# Altium PCB old_Sampler_DIOT.PCBDOC (part 7 of 8)
Units mm, origin at the board's own origin, x right, y up, seen from the top; angles counter-clockwise.
Board outline 221.17 x 100 mm, 4 copper layers (Top, GP1(GND), L3, Bot), stack 1.648 mm thick; 664 components, 413 nets, 2128 pads, 926 vias.
Unrouted connection lines stored in the file: 1.
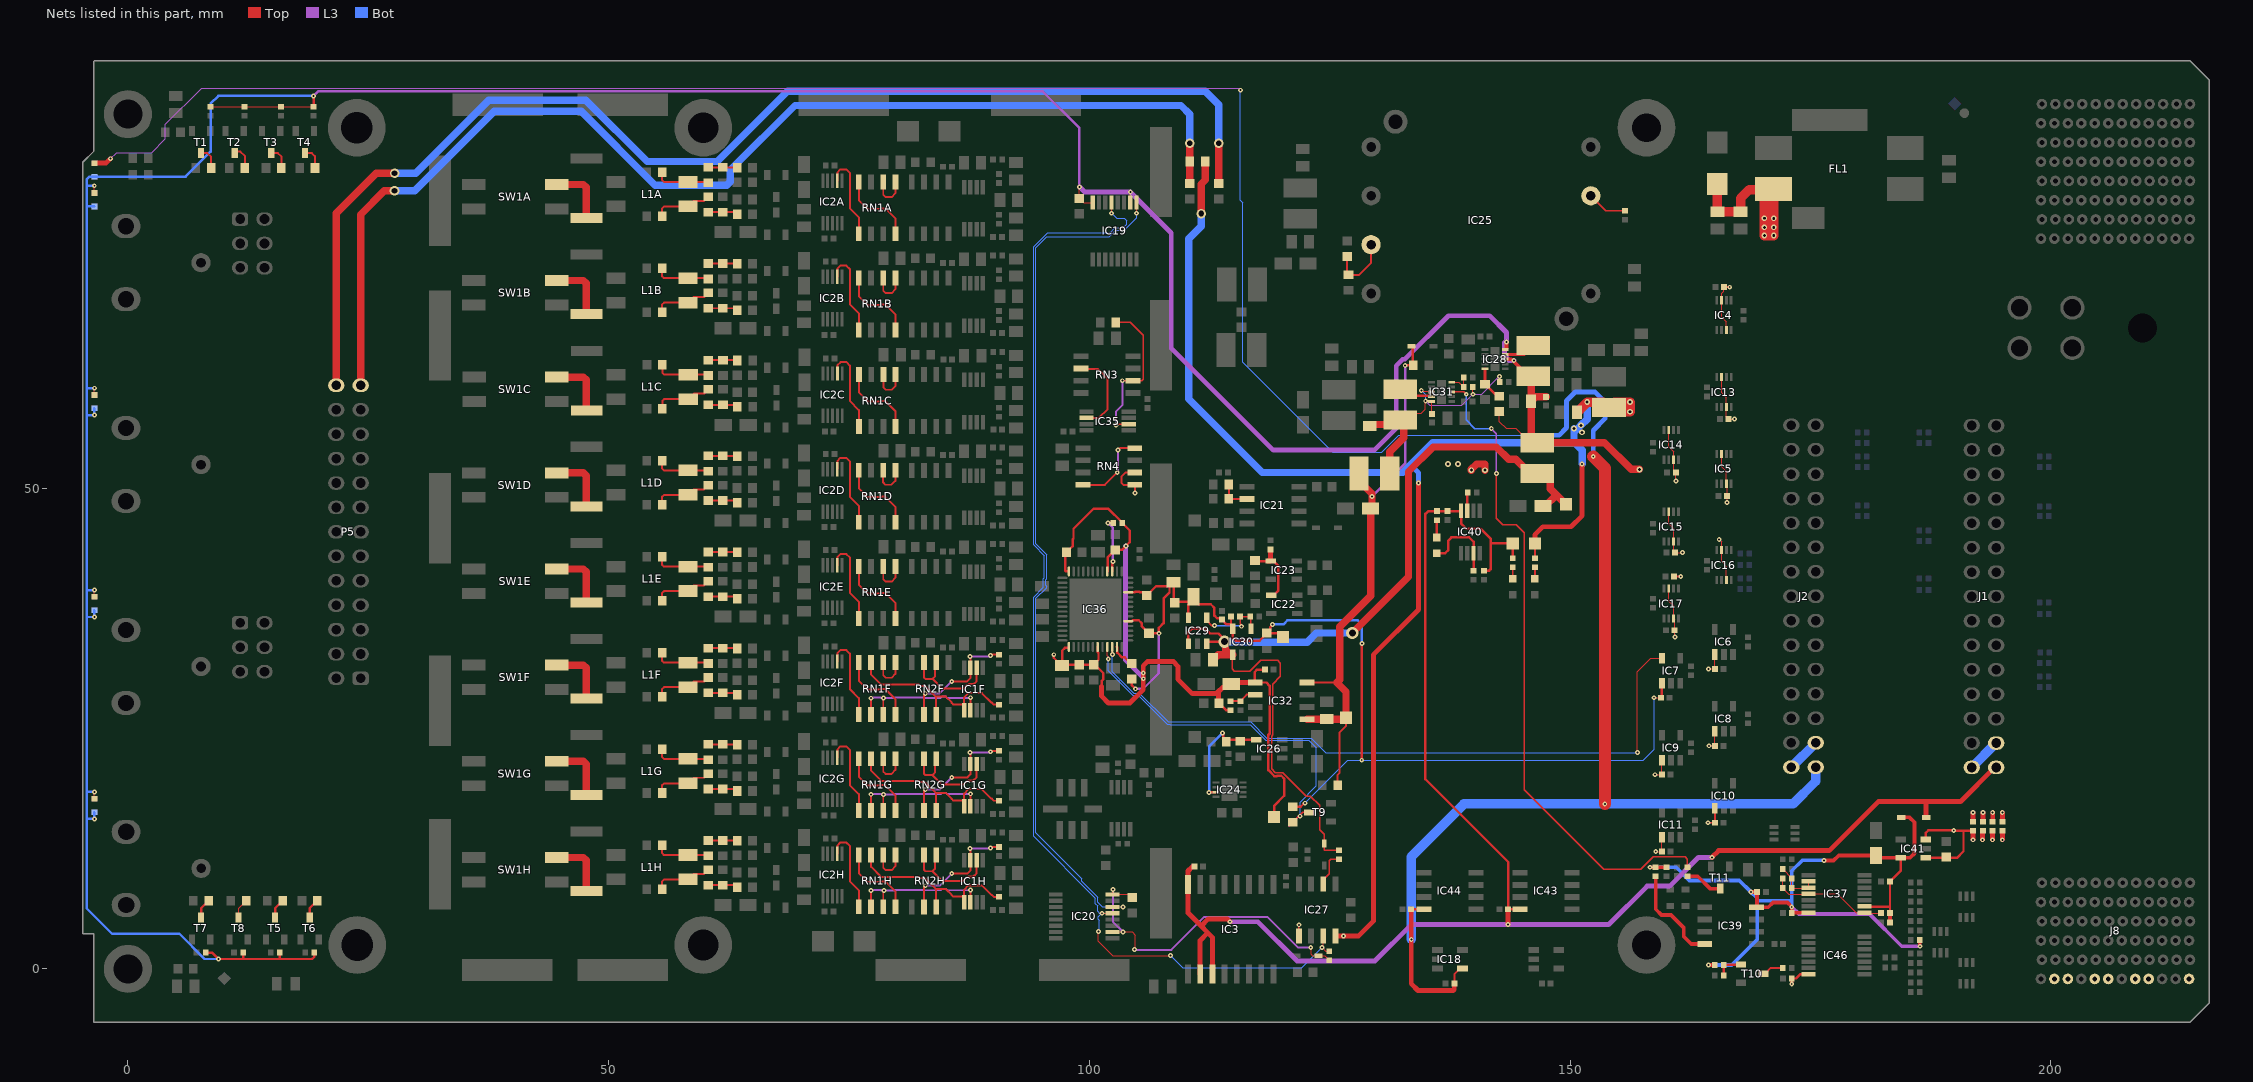
[diagram p8: the nets of this part, all layers, seen from the top]

## Via types
v1: diameter 0.5, hole 0.2, Top to Bot, tented both sides, 694 vias
v2: diameter 0.5, hole 0.2, Top to Bot, 186 vias
v3: diameter 0.6, hole 0.3, Top to Bot, tented both sides, 24 vias
v4: diameter 1, hole 0.6, Top to Bot, tented both sides, 12 vias
v5: diameter 0.6, hole 0.3, Top to Bot, 6 vias
v6: diameter 0.406, hole 0.203, Top to Bot, 2 vias
v7: diameter 1.27, hole 0.711, Top to Bot, 2 vias

## Nets (pads, with @x,y where several pads share a name; then routed paths per layer and width w, separated by ;. In a path a pad name is that pad's centre, name@x,y a point inside that pad or via, vN(x,y) a via of type N, cw(c..) or ccw(c..) an arc to the next point about the centre after c; other vN are vias at no path point) (continued)
NetIC1F_1: IC1F.1 R6F.1 RN1F.7 RN2F.7 | length 19.7
  Top w0.203: RN1F.7@77.288,31.857 77.288,30.611 78.344,29.555 82.277,29.555 82.407,29.425 82.91,29.425 84.064,28.27 ; RN2F.7@84.064,26.455 84.064,28.27 ; IC1F.1@86.969,26.909 IC1F.1@86.969,27.506 ; R6F.1@90.603,27.486 90.073,27.486 89.853,27.706 89.793,27.706 88.815,28.684 87.421,28.684 86.969,28.232 IC1F.1@86.969,27.506 ; 84.064,28.27 84.103,28.309 85.067,28.309 85.665,27.711 85.665,27.67 85.829,27.506 IC1F.1@86.969,27.506
NetIC1F_2: IC1F.2 RN1F.2 RN1F.3 | length 15
  Top w0.203: v1(77.269,28.155) 77.269,26.477 RN1F.2@77.288,26.457 ; RN1F.3@78.558,26.457 78.558,28.144 v1(78.594,28.18) ; IC1F.2@87.619,26.909 v1(87.619,28.205)
  L3 w0.203: v1(77.269,28.155) 77.319,28.205 78.292,28.205 78.346,28.151 ; v1@78.594,28.151 79.74,28.151 79.794,28.205 82.703,28.205 82.731,28.177 84.539,28.177 84.671,28.309 85.067,28.309 85.199,28.177 87.591,28.177 v1(87.619,28.205)
NetIC1F_6: IC1F.6 RN2F.2 RN2F.3 | length 11.1
  Top w0.203: RN2F.3@82.794,31.855 82.794,30.29 82.929,30.155 83.679,30.155 ; RN2F.2@84.064,31.855 83.929,31.72 83.929,30.405 83.679,30.155 ; IC1F.6@88.269,31.309 88.269,29.934 87.944,29.609 87.465,29.609 87.391,29.535 87.257,29.535 86.877,29.155 84.679,29.155 83.679,30.155
NetIC1F_7: IC1F.7 R12F.1 RN2F.6 | length 13
  Top w0.203: RN2F.6@82.794,26.455 82.794,28.52 v1(82.929,28.655) ; v1(85.679,29.905) 87.294,29.905 87.619,30.23 IC1F.7@87.619,31.309 87.619,32.48 v1(87.594,32.505) ; v1(89.719,32.58) 89.815,32.676 R12F.1@90.603,32.676
  L3 w0.203: v1(82.929,28.655) 84.429,28.655 v1(85.679,29.905) ; v1(87.594,32.505) 89.644,32.505 v1(89.719,32.58)
NetIC1G_1: IC1G.1 R6G.1 RN1G.7 RN2G.7 | length 19.7
  Top w0.203: RN1G.7@77.288,21.857 77.288,20.611 78.344,19.555 82.277,19.555 82.407,19.425 82.91,19.425 84.064,18.27 ; RN2G.7@84.064,16.455 84.064,18.27 ; IC1G.1@86.969,16.909 IC1G.1@86.969,17.506 ; R6G.1@90.603,17.486 90.073,17.486 89.853,17.706 89.793,17.706 88.815,18.684 87.421,18.684 86.969,18.232 IC1G.1@86.969,17.506 ; 84.064,18.27 84.103,18.309 85.067,18.309 85.665,17.711 85.665,17.67 85.829,17.506 IC1G.1@86.969,17.506
NetIC1G_2: IC1G.2 RN1G.2 RN1G.3 | length 15.3
  Top w0.203: v1(77.269,18.155) 77.298,18.126 77.298,17.207 77.269,17.178 77.269,16.477 RN1G.2@77.288,16.457 ; RN1G.3@78.558,16.457 78.558,18.116 v1(78.594,18.151) ; IC1G.2@87.619,16.909 v1(87.619,18.205)
  L3 w0.203: v1(77.269,18.155) 77.319,18.205 78.292,18.205 78.346,18.151 v1(78.594,18.151) 79.74,18.151 79.794,18.205 82.703,18.205 82.731,18.177 84.539,18.177 84.671,18.309 85.067,18.309 85.199,18.177 87.591,18.177 v1(87.619,18.205)
NetIC1G_6: IC1G.6 RN2G.2 RN2G.3 | length 11.1
  Top w0.203: RN2G.3@82.794,21.855 82.794,20.29 82.929,20.155 83.679,20.155 ; RN2G.2@84.064,21.855 83.929,21.72 83.929,20.405 83.679,20.155 ; IC1G.6@88.269,21.309 88.269,19.934 87.944,19.609 87.465,19.609 87.391,19.535 87.257,19.535 86.877,19.155 84.679,19.155 83.679,20.155
NetIC1G_7: IC1G.7 R12G.1 RN2G.6 | length 13
  Top w0.203: RN2G.6@82.794,16.455 82.794,18.52 v1(82.929,18.655) ; v1(85.679,19.905) 87.294,19.905 87.619,20.23 87.619,22.48 v1(87.594,22.505) ; v1(89.719,22.58) 89.815,22.676 R12G.1@90.603,22.676
  L3 w0.203: v1(82.929,18.655) 84.429,18.655 v1(85.679,19.905) ; v1(87.594,22.505) 89.644,22.505 v1(89.719,22.58)
NetIC1H_1: IC1H.1 R6H.1 RN1H.7 RN2H.7 | length 19.7
  Top w0.203: RN1H.7@77.288,11.857 77.288,10.611 78.344,9.555 82.277,9.555 82.407,9.425 82.91,9.425 84.064,8.27 ; RN2H.7@84.064,6.455 84.064,8.27 ; IC1H.1@86.969,6.909 IC1H.1@86.969,7.506 ; R6H.1@90.603,7.486 90.073,7.486 89.853,7.706 89.793,7.706 88.815,8.684 87.421,8.684 86.969,8.232 IC1H.1@86.969,7.506 ; 84.064,8.27 84.103,8.309 85.067,8.309 85.665,7.711 85.665,7.67 85.829,7.506 IC1H.1@86.969,7.506
NetIC1H_2: IC1H.2 RN1H.2 RN1H.3 | length 15.3
  Top w0.203: v1(77.269,8.155) 77.269,6.477 RN1H.2@77.288,6.457 ; RN1H.3@78.558,6.457 78.558,8.091 v1(78.619,8.151) ; IC1H.2@87.619,6.909 v1(87.619,8.205)
  L3 w0.203: v1(77.269,8.155) 77.319,8.205 78.292,8.205 78.346,8.151 v1(78.619,8.151) 79.74,8.151 79.794,8.205 82.703,8.205 82.731,8.177 84.539,8.177 84.671,8.309 85.067,8.309 85.199,8.177 87.591,8.177 v1(87.619,8.205)
NetIC1H_6: IC1H.6 RN2H.2 RN2H.3 | length 11.1
  Top w0.203: RN2H.3@82.794,11.855 82.794,10.29 82.929,10.155 83.679,10.155 ; RN2H.2@84.064,11.855 83.929,11.72 83.929,10.405 83.679,10.155 ; IC1H.6@88.269,11.309 88.269,9.934 87.944,9.609 87.465,9.609 87.391,9.535 87.257,9.535 86.877,9.155 84.679,9.155 83.679,10.155
NetIC1H_7: IC1H.7 R12H.1 RN2H.6 | length 13
  Top w0.203: RN2H.6@82.794,6.455 82.794,8.52 v1(82.929,8.655) ; v1(85.679,9.905) 87.294,9.905 87.619,10.23 87.619,12.48 v1(87.594,12.505) ; v1(89.719,12.58) 89.815,12.676 R12H.1@90.603,12.676
  L3 w0.203: v1(82.929,8.655) 84.429,8.655 v1(85.679,9.905) ; v1(87.594,12.505) 89.644,12.505 v1(89.719,12.58)
NetIC2A_7: IC2A.7 RN1A.1 | length 9.2
  Top w0.203: IC2A.7@73.775,81.967 73.775,82.815 74.105,83.145 74.723,83.145 75.075,82.793 75.075,79.11 76.018,78.167 RN1A.1@76.018,76.457
NetIC2B_7: IC2B.7 RN1B.1 | length 9.2
  Top w0.203: IC2B.7@73.775,71.967 73.775,72.815 74.105,73.145 74.723,73.145 75.075,72.793 75.075,69.11 76.018,68.167 RN1B.1@76.018,66.457
NetIC2C_7: IC2C.7 RN1C.1 | length 9.2
  Top w0.203: IC2C.7@73.788,61.923 73.788,62.771 74.118,63.101 74.736,63.101 75.088,62.749 75.088,59.066 76.031,58.123 RN1C.1@76.031,56.413
NetIC2D_7: IC2D.7 RN1D.1 | length 9.2
  Top w0.203: IC2D.7@73.775,51.967 73.775,52.815 74.105,53.145 74.723,53.145 75.075,52.793 75.075,49.11 76.018,48.167 RN1D.1@76.018,46.457
NetIC2E_7: IC2E.7 RN1E.1 | length 9.2
  Top w0.203: IC2E.7@73.775,41.967 73.775,42.815 74.105,43.145 74.723,43.145 75.075,42.793 75.075,39.11 76.018,38.167 RN1E.1@76.018,36.457
NetIC2F_7: IC2F.7 RN1F.1 | length 9.2
  Top w0.203: IC2F.7@73.775,31.967 73.775,32.815 74.105,33.145 74.723,33.145 75.075,32.793 75.075,29.11 76.018,28.167 RN1F.1@76.018,26.457
NetIC2G_7: IC2G.7 RN1G.1 | length 9.2
  Top w0.203: IC2G.7@73.775,21.967 73.775,22.815 74.105,23.145 74.723,23.145 75.075,22.793 75.075,19.11 76.018,18.167 RN1G.1@76.018,16.457
NetIC2H_7: IC2H.7 RN1H.1 | length 9.2
  Top w0.203: IC2H.7@73.775,11.967 73.775,12.815 74.105,13.145 74.723,13.145 75.075,12.793 75.075,9.11 76.018,8.167 RN1H.1@76.018,6.457
NetIC7_5: IC7.5 IC36.24 | length 72.2
  Top w0.127: IC36.24@102.364,33.49 102.364,32.717 v1(102.399,32.682) ; v2(157,22.5) 157,30.9 158.4,32.3 IC7.5@159.55,32.3
  Bot w0.127: v1(102.399,32.682) 102.399,30.902 104.612,28.69 105.203,28.69 108.203,25.69 116.774,25.69 118.455,24.008 123.066,24.008 124.574,22.5 v2(157,22.5)
NetIC19_9: IC19.9 IC20.14 | length 89.1
  Top w0.127: IC20.14@102.399,6.437 v1(103.501,6.437) ; v1(104.904,78.595) IC19.9@104.904,79.697
  Bot w0.127: v1(103.501,6.437) 101.324,6.437 100.856,6.904 100.856,7.468 99.194,9.13 99.194,9.38 94.44,14.134 94.44,38.53 95.575,39.665 95.575,39.801 95.477,39.9 95.477,40.492 95.575,40.591 95.575,43.079 94.44,44.214 94.44,56.774 94.443,56.777 94.443,57.583 94.44,57.586 94.44,74.991 95.583,76.134 102.075,76.134 102.761,76.82 103.617,76.82 104.904,78.107 v1(104.904,78.595)
NetIC21_2: IC21.2 R51.1 R52.2 | length 3.4
  Top w0.203: R52.2@114.494,50.38 R51.1@114.494,48.88 116.378,48.88 IC21.2@116.393,48.864
NetIC22_4: IC22.4 IC23.4 R54.1 R55.2 | length 7.4
  Top w0.254: R54.1@117.217,42.48 117.289,42.408 IC23.4@118.569,42.408 ; IC23.4@118.832,42.408 119.13,42.408 119.648,41.89 119.648,39.344 119.169,38.865 IC22.4@118.894,38.865
  Top w0.508: IC23.4@118.558,42.408 118.569,42.419 IC23.4@118.844,42.419 118.832,42.431 118.832,43.609 R55.2@118.819,43.621
NetIC24_3: IC24.3 IC26.4 R61.1 R63.2 | length 11.7
  Top w0.254: v1(112.438,18.355) 112.465,18.382 113.167,18.382 IC24.3@113.169,18.384 ; v1(113.837,24.53) 113.921,24.446 113.921,23.953 R63.2@114.244,23.63 114.444,23.83 IC26.4@117.344,23.83
  Bot w0.254: v1(112.438,18.355) 112.47,18.387 112.47,23.163 v1(113.837,24.53)
NetIC25_2: IC25.2 R57.2 | length 4.2
  Top w0.203: IC25.2@152.154,80.405 153.709,78.85 R57.2@155.694,78.85
NetIC25_6: IC25.6 R56.1 R58.2 | length 6.7
  Top w0.203: R58.2@126.813,74.099 126.813,72.311 R56.1@126.944,72.18 128.055,72.18 129.294,73.419 IC25.6@129.294,75.325
NetIC27_2: IC27.2 R60.1 | length 3.7
  Top w0.152: IC27.2@124.329,8.83 124.329,9.265 124.944,9.88 124.944,11.23 125.124,11.41 R60.1@125.944,11.41
NetIC28_5: IC28.5 R66.1 R68.2 | length 3.4
  Top w0.305: R68.2@141.141,60.82 142.391,59.57 R66.1@142.641,59.57 ; R68.2@141.142,61.069 IC28.5@141.142,62.415
NetIC28_9: IC28.9 L7.1 | length 3.3
  Top w0.33: IC28.9@143.242,63.915 145.245,63.915 L7.1@146.165,64.835
NetIC29_4: IC29.4 IC30.4 R70.1 R71.2 | length 7.6
  Top w0.152: IC29.4@112.194,36.532 112.194,36.257 112.742,35.709 v1(113.021,35.709) ; v1(115.821,35.632) 115.821,35.726 115.664,35.883 R70.1@115.664,36.63 R71.2@116.724,36.63 116.795,36.559 IC30.4@116.795,35.379
  Bot w0.152: v1(113.021,35.709) 113.06,35.671 115.782,35.671 v1(115.821,35.632)
NetIC31_3: IC31.3 R111.2 | length 68.9
  Top w0.152: IC31.3@137.691,60.02 138.533,60.02 138.547,60.007 138.955,60.007 v2(139.192,59.77) ; v2(142.33,51.529) 142.33,46.87 143,46.2 144.4,46.2 145.245,45.355 145.245,18.606 153.506,10.346 154.761,10.346 157.346,10.346 158.653,11.653 160.912,11.653 161.288,11.653 161.947,11.653 162.2,11.4 R111.2@162.2,10.57
  L3 w0.152: v2(141.8,56.2) 142.33,55.67 v2(142.33,51.529)
  Bot w0.152: v2(139.192,59.77) 139.192,57.109 140.1,56.2 v2(141.8,56.2)
NetIC31_5: IC31.5 R72.1 R74.2 | length 2.4
  Top w0.127: IC31.5@137.691,61.02 138.421,61.02 R72.1@138.921,60.52 R74.2@138.921,61.52
NetIC31_9: IC31.9 L9.1 | length 3.6
  Top w0.127: L9.1@132.313,60.295 L9.1@133.002,59.606 ; IC31.9@135.504,59.606 IC31.9@135.591,59.52
  Top w0.254: L9.1@133.002,59.606 IC31.9@135.504,59.606
NetIC32_2: IC32.2 R73.1 R75.2 | length 2.8
  Top w0.203: R73.1@114.694,27.85 R75.2@115.694,27.85 116.359,28.515 IC32.2@117.244,28.515
NetIC35_2: IC35.2 RN3.6 | length 8.9
  Top w0.203: RN3.6@99.144,62.44 99.183,62.401 100.873,62.401 101.894,61.38 101.894,58.228 100.971,57.305 IC35.2@99.694,57.305
NetIC35_6: IC35.6 R83.1 RN3.2 | length 16.5
  Top w0.152: R83.1@102.744,67.23 104.269,67.23 105.594,65.905 105.594,61.305 105.459,61.17 RN3.2@104.544,61.17 ; v1(102.769,56.555) 102.869,56.655 IC35.6@104.094,56.655
  Top w0.203: v1(103.419,61.18) 103.429,61.17 RN3.2@104.544,61.17
  L3 w0.203: v1(102.769,56.555) 102.769,57.98 103.419,58.63 v1(103.419,61.18)
NetIC36_23: IC36.23 R76.2 T9.3 | length 38
  Top w0.127: IC36.23@101.864,33.49 101.864,32.545 101.958,32.451 v1(101.958,32.229)
  Top w0.152: R76.2@120.756,14.86 R76.2@121.159,15.264 122.163,16.267 T9.3@122.829,16.267
  Bot w0.127: v1(101.958,32.229) 101.958,30.984 104.506,28.436 105.098,28.436 108.098,25.436 108.348,25.436 108.386,25.397 116.706,25.397 118.35,23.754 122.82,23.754 123.594,22.98 123.594,19.041 121.909,17.356 v1(121.909,15.88)
NetIC36_25: IC36.25 R77.2 | length 2.4
  Top w0.254: IC36.25@102.864,33.49 102.903,33.451 102.903,32.884 103.382,32.405 103.669,32.405 R77.2@104.269,31.805
NetIC36_43: IC36.43 R78.1 | length 5.8
  Top w0.254: v1(101.944,46.38) R78.1@102.474,46.38 ; IC36.43@102.364,41.34 102.364,42.285 v1(102.444,42.365)
  L3 w0.254: v1(101.944,46.38) 102.444,45.88 v1(102.444,42.365)
NetIC37_1: IC37.1 IC37.11 R103.1 R105.1 R106.1 | length 12.5
  Top w0.127: R106.1@172.13,9.55 R105.1@172.13,8.4 172.755,7.775 174.8,7.775 IC37.11@175.001,7.775 ; IC37.11@174.8,7.8 175.001,7.8 177.796,7.8 179.771,5.825 IC37.1@180.6,5.825 ; IC37.1@180.6,5.85 180.675,5.775 R103.1@182.131,5.775
NetIC37_9: IC37.9 IC37.10 R105.2 R106.2 R108.2 | length 4.9
  Top w0.127: R108.2@172.13,10.39 173.07,9.45 R106.2@173.07,9.4 ; R106.2@173.07,9.55 R105.2@173.07,8.4 IC37.10@174.8,8.4 ; IC37.10@174.8,8.45 IC37.9@174.8,9.1
NetIC39_4: IC39.4 R110.2 | length 10.6
  Top w0.381: R110.2@158.9,9.63 158.9,6.2 159.5,5.6 160.5,5.6 161.8,4.3 161.8,3.4 162.605,2.595 IC39.4@164,2.595
NetIC40_3: IC40.3 LD6.1 R116.1 | length 8.1
  Top w0.254: LD6.1@136.13,43.225 136.989,43.225 137.33,43.566 137.33,44.55 137.655,44.875 139.505,44.875 139.961,44.419 139.961,43.2 R116.1@139.961,41.62 ; R116.1@139.93,41.37 R116.1@139.93,41.42
NetIC40_7: IC40.7 R117.2 | length 1.9
  Top w0.254: IC40.7@139.311,47.65 R117.2@139.311,49.55
NetL1A_3: L1A.3 R8A.2 R9A.1 | length 6.1
  Top w0.203: R8A.2@55.564,78.288 55.564,79.113 55.755,79.304 L1A.3@58.26,79.304 58.836,79.88 59.92,79.88 R9A.1@60.352,80.312
NetL1A_4: L1A.4 R1A.2 R2A.1 | length 5.7
  Top w0.203: R1A.2@55.564,82.86 55.564,82.029 55.749,81.844 L1A.4@58.26,81.844 60.268,81.844 R2A.1@60.352,81.76
NetL1B_3: L1B.3 R8B.2 R9B.1 | length 6.1
  Top w0.203: R8B.2@55.564,68.288 55.564,69.113 55.755,69.304 L1B.3@58.26,69.304 58.836,69.88 59.92,69.88 R9B.1@60.352,70.312
NetL1B_4: L1B.4 R1B.2 R2B.1 | length 5.7
  Top w0.203: R1B.2@55.564,72.86 55.564,72.029 55.749,71.844 L1B.4@58.26,71.844 60.268,71.844 R2B.1@60.352,71.76
NetL1C_3: L1C.3 R8C.2 R9C.1 | length 6.1
  Top w0.203: R8C.2@55.577,58.244 55.577,59.069 55.767,59.26 L1C.3@58.273,59.26 58.849,59.836 59.933,59.836 R9C.1@60.365,60.268
NetL1C_4: L1C.4 R1C.2 R2C.1 | length 5.7
  Top w0.203: R1C.2@55.577,62.816 55.577,61.985 55.762,61.8 L1C.4@58.273,61.8 60.281,61.8 R2C.1@60.365,61.716
NetL1D_3: L1D.3 R8D.2 R9D.1 | length 6.1
  Top w0.203: R8D.2@55.564,48.288 55.564,49.113 55.755,49.304 L1D.3@58.26,49.304 58.836,49.88 59.92,49.88 R9D.1@60.352,50.312
NetL1D_4: L1D.4 R1D.2 R2D.1 | length 5.7
  Top w0.203: R1D.2@55.564,52.86 55.564,52.029 55.749,51.844 L1D.4@58.26,51.844 60.268,51.844 R2D.1@60.352,51.76
NetL1E_3: L1E.3 R8E.2 R9E.1 | length 6.1
  Top w0.203: R8E.2@55.564,38.288 55.564,39.113 55.755,39.304 L1E.3@58.26,39.304 58.836,39.88 59.92,39.88 R9E.1@60.352,40.312
NetL1E_4: L1E.4 R1E.2 R2E.1 | length 5.7
  Top w0.203: R1E.2@55.564,42.86 55.564,42.029 55.749,41.844 L1E.4@58.26,41.844 60.268,41.844 R2E.1@60.352,41.76
NetL1F_3: L1F.3 R8F.2 R9F.1 | length 6.1
  Top w0.203: R8F.2@55.564,28.288 55.564,29.113 55.755,29.304 L1F.3@58.26,29.304 58.836,29.88 59.92,29.88 R9F.1@60.352,30.312
NetL1F_4: L1F.4 R1F.2 R2F.1 | length 5.7
  Top w0.203: R1F.2@55.564,32.86 55.564,32.029 55.749,31.844 L1F.4@58.26,31.844 60.268,31.844 R2F.1@60.352,31.76
NetL1G_3: L1G.3 R8G.2 R9G.1 | length 6.1
  Top w0.203: R8G.2@55.564,18.288 55.564,19.113 55.755,19.304 L1G.3@58.26,19.304 58.836,19.88 59.92,19.88 R9G.1@60.352,20.312
NetL1G_4: L1G.4 R1G.2 R2G.1 | length 5.7
  Top w0.203: R1G.2@55.564,22.86 55.564,22.029 55.749,21.844 L1G.4@58.26,21.844 60.268,21.844 R2G.1@60.352,21.76
NetL1H_3: L1H.3 R8H.2 R9H.1 | length 6.1
  Top w0.203: R8H.2@55.564,8.288 55.564,9.113 55.755,9.304 L1H.3@58.26,9.304 58.836,9.88 59.92,9.88 R9H.1@60.352,10.312
NetL1H_4: L1H.4 R1H.2 R2H.1 | length 5.7
  Top w0.203: R1H.2@55.564,12.86 55.564,12.029 55.749,11.844 L1H.4@58.26,11.844 60.268,11.844 R2H.1@60.352,11.76
NetLD6_2: LD6.2 R114.1 | length 1.8
  Top w0.254: LD6.2@136.13,44.875 R114.1@136.13,46.68
NetLD7_2: LD7.2 R119.1 | length 1.3
  Top w0.203: LD7.2@144.03,40.475 R119.1@144.03,41.78
NetLD8_2: LD8.2 R118.1 | length 1.2
  Top w0.203: LD8.2@146.33,40.575 R118.1@146.33,41.78
NetP5_25: P5.25 R41.1 R86.1 | length 123.4
  Top w0.762: P5.25@24.2,60.69 24.2,78.462 26.663,80.925 v4(27.725,80.925) ; R41.1@110.444,81.68 v4(110.444,85.88)
  Bot w0.762: v4(27.725,80.925) 29.818,80.925 38.082,89.189 47.135,89.189 54.819,81.505 62.269,81.505 62.649,81.885 62.649,83.085 69.369,89.805 109.519,89.805 110.444,88.88 v4(110.444,85.88)
NetP5_26: P5.26 R42.1 | length 129
  Top w0.762: P5.26@21.66,60.69 21.66,78.585 25.825,82.75 v4(27.73,82.75) ; R42.1@113.444,81.68 v4(113.444,85.88)
  Bot w0.762: v4(27.73,82.75) 29.93,82.75 37.53,90.35 47.63,90.35 54.008,83.972 61.297,83.972 68.598,91.273 112.051,91.273 113.444,89.88 v4(113.444,85.88)
NetR2A_2: R2A.2 R3A.1 R4A.2 | length 3
  Top w0.203: R2A.2@60.352,83.36 R4A.2@61.876,83.36 63.324,83.36 R3A.1@63.362,83.322
NetR2B_2: R2B.2 R3B.1 R4B.2 | length 3
  Top w0.203: R2B.2@60.352,73.36 63.324,73.36 R3B.1@63.362,73.322
NetR2C_2: R2C.2 R3C.1 R4C.2 | length 3
  Top w0.203: R2C.2@60.365,63.316 63.337,63.316 R3C.1@63.375,63.278
NetR2D_2: R2D.2 R3D.1 R4D.2 | length 3
  Top w0.203: R2D.2@60.352,53.36 R4D.2@61.876,53.36 63.324,53.36 R3D.1@63.362,53.322
NetR2E_2: R2E.2 R3E.1 R4E.2 | length 3
  Top w0.203: R2E.2@60.352,43.36 63.324,43.36 R3E.1@63.362,43.322
NetR2F_2: R2F.2 R3F.1 R4F.2 | length 3
  Top w0.203: R2F.2@60.352,33.36 R4F.2@61.876,33.36 63.324,33.36 R3F.1@63.362,33.322
NetR2G_2: R2G.2 R3G.1 R4G.2 | length 3
  Top w0.203: R2G.2@60.352,23.36 63.324,23.36 R3G.1@63.362,23.322
NetR2H_2: R2H.2 R3H.1 R4H.2 | length 3
  Top w0.203: R2H.2@60.352,13.36 R4H.2@61.876,13.36 63.324,13.36 R3H.1@63.362,13.322
NetR5A_1: R5A.1 SW1A.4 | length 6.4
  Top w0.203: R5A.1@47.652,78.147 R5A.1@47.694,78.105
  Top w0.762: SW1A.4@44.586,81.59 47.367,81.59 47.652,81.305 R5A.1@47.652,78.147
NetR5B_1: R5B.1 SW1B.4 | length 6.4
  Top w0.203: R5B.1@47.652,68.147 R5B.1@47.694,68.105
  Top w0.762: SW1B.4@44.586,71.59 47.367,71.59 47.652,71.305 R5B.1@47.652,68.147
NetR5C_1: R5C.1 SW1C.4 | length 6.4
  Top w0.203: R5C.1@47.665,58.103 R5C.1@47.707,58.061
  Top w0.762: SW1C.4@44.599,61.546 47.38,61.546 47.665,61.261 R5C.1@47.665,58.103
NetR5D_1: R5D.1 SW1D.4 | length 6.4
  Top w0.203: R5D.1@47.652,48.147 R5D.1@47.694,48.105
  Top w0.762: SW1D.4@44.586,51.59 47.367,51.59 47.652,51.305 R5D.1@47.652,48.147
NetR5E_1: R5E.1 SW1E.4 | length 6.4
  Top w0.203: R5E.1@47.652,38.147 R5E.1@47.694,38.105
  Top w0.762: SW1E.4@44.586,41.59 47.367,41.59 47.652,41.305 R5E.1@47.652,38.147
NetR5F_1: R5F.1 SW1F.4 | length 6.4
  Top w0.203: R5F.1@47.652,28.147 R5F.1@47.694,28.105
  Top w0.762: SW1F.4@44.586,31.59 47.367,31.59 47.652,31.305 R5F.1@47.652,28.147
NetR5G_1: R5G.1 SW1G.4 | length 6.4
  Top w0.203: R5G.1@47.652,18.147 R5G.1@47.694,18.105
  Top w0.762: SW1G.4@44.586,21.59 47.367,21.59 47.652,21.305 R5G.1@47.652,18.147
NetR5H_1: R5H.1 SW1H.4 | length 6.4
  Top w0.203: R5H.1@47.652,8.147 R5H.1@47.694,8.105
  Top w0.762: SW1H.4@44.586,11.59 47.367,11.59 47.652,11.305 R5H.1@47.652,8.147
NetR9A_2: R9A.2 R10A.1 R11A.2 | length 3.1
  Top w0.203: R9A.2@60.352,78.712 R11A.2@61.876,78.712 63.146,78.712 R10A.1@63.362,78.496
NetR9B_2: R9B.2 R10B.1 R11B.2 | length 3.1
  Top w0.203: R9B.2@60.352,68.712 63.146,68.712 R10B.1@63.362,68.496
NetR9C_2: R9C.2 R10C.1 R11C.2 | length 3.1
  Top w0.203: R9C.2@60.365,58.668 63.159,58.668 R10C.1@63.375,58.452
NetR9D_2: R9D.2 R10D.1 R11D.2 | length 3.1
  Top w0.203: R9D.2@60.352,48.712 63.146,48.712 R10D.1@63.362,48.496
NetR9E_2: R9E.2 R10E.1 R11E.2 | length 3.1
  Top w0.203: R9E.2@60.352,38.712 63.146,38.712 R10E.1@63.362,38.496
NetR9F_2: R9F.2 R10F.1 R11F.2 | length 3.1
  Top w0.203: R9F.2@60.352,28.712 R11F.2@61.876,28.712 63.146,28.712 R10F.1@63.362,28.496
NetR9G_2: R9G.2 R10G.1 R11G.2 | length 3.1
  Top w0.203: R9G.2@60.352,18.712 63.146,18.712 R10G.1@63.362,18.496
NetR9H_2: R9H.2 R10H.1 R11H.2 | length 3.1
  Top w0.203: R9H.2@60.352,8.712 R11H.2@61.876,8.712 63.146,8.712 R10H.1@63.362,8.496
NetR26_2: R26.2 T1.3 | length 2.4
  Top w0.203: T1.3@7.6,84.85 8.25,84.85 8.65,84.45 R26.2@8.65,83.3
NetR28_2: R28.2 T2.3 | length 2.4
  Top w0.203: T2.3@11.194,85 11.7,85 12.15,84.55 R28.2@12.15,83.3
NetR30_2: R30.2 T3.3 | length 2.4
  Top w0.203: T3.3@14.9,84.85 15.6,84.85 15.95,84.5 R30.2@15.95,83.3
NetR32_2: R32.2 T4.3 | length 2.4
  Top w0.203: T4.3@18.4,84.85 19.13,84.85 19.45,84.53 R32.2@19.45,83.3
NetR34_2: R34.2 T5.3 | length 2.1
  Top w0.254: T5.3@15.3,5.35 15.3,6.3 R34.2@16.1,7.1
NetR37_2: R37.2 T6.3 | length 2.1
  Top w0.254: T6.3@18.9,5.35 18.9,6.3 R37.2@19.7,7.1
NetR40_2: R40.2 T7.3 | length 2.1
  Top w0.254: T7.3@7.6,5.35 7.6,6.3 R40.2@8.4,7.1
NetR44_2: R44.2 T8.3 | length 2.1
  Top w0.127: T8.3@11.5,5.35 11.5,6.3 R44.2@12.3,7.1
NetR101_1: R101.1 T10.3 | length 2.4
  Top w0.203: T10.3@170.08,-0.5 170.28,-0.5 170.88,0.1 R101.1@172.13,0.1 R101.1@172.25,0.1
NetR102_1: R102.1 R157.2 T10.1 | length 2.9
  Top w0.254: R157.2@165.97,-0.7 R102.1@165.97,0.4 165.97,0.42 166,0.45 T10.1@167.78,0.45
NetR111_1: R111.1 T11.3 | length 3.9
  Top w0.381: R111.1@162.2,9.63 163.27,9.63 164.55,8.35 T11.3@165.6,8.35
NetRN1A_4: RN1A.4 RN1A.8 | length 8.1
  Top w0.203: RN1A.8@76.024,81.76 76.024,79.965 76.929,79.06 78.297,79.06 78.346,79.109 78.742,79.109 79.834,78.017 RN1A.4@79.834,76.36
NetRN1A_5: RN1A.5 RN1A.6 | length 4
  Top w0.203: RN1A.6@78.558,81.857 78.558,80.516 78.794,80.28 79.419,80.28 79.828,80.689 RN1A.5@79.828,81.857
NetRN1B_4: RN1B.4 RN1B.8 | length 8.1
  Top w0.203: RN1B.8@76.024,71.76 76.024,69.965 76.929,69.06 78.297,69.06 78.346,69.109 78.742,69.109 79.834,68.017 RN1B.4@79.834,66.36
NetRN1B_5: RN1B.5 RN1B.6 | length 4
  Top w0.203: RN1B.6@78.558,71.857 78.558,70.516 78.794,70.28 79.419,70.28 79.828,70.689 RN1B.5@79.828,71.857
NetRN1C_4: RN1C.4 RN1C.8 | length 8.1
  Top w0.203: RN1C.8@76.037,61.716 76.037,59.921 76.942,59.016 78.31,59.016 78.358,59.065 78.755,59.065 79.847,57.973 RN1C.4@79.847,56.316
NetRN1C_5: RN1C.5 RN1C.6 | length 4
  Top w0.203: RN1C.6@78.571,61.813 78.571,60.472 78.807,60.236 79.432,60.236 79.841,60.646 RN1C.5@79.841,61.813
NetRN1D_4: RN1D.4 RN1D.8 | length 8.1
  Top w0.203: RN1D.8@76.024,51.76 76.024,49.965 76.929,49.06 78.297,49.06 78.346,49.109 78.742,49.109 79.834,48.017 RN1D.4@79.834,46.36
NetRN1D_5: RN1D.5 RN1D.6 | length 4
  Top w0.203: RN1D.6@78.544,51.93 78.544,50.588 78.78,50.353 79.405,50.353 79.814,50.762 RN1D.5@79.814,51.93
NetRN1E_4: RN1E.4 RN1E.8 | length 8.1
  Top w0.203: RN1E.8@76.024,41.76 76.024,39.965 76.929,39.06 78.297,39.06 78.346,39.109 78.742,39.109 79.834,38.017 RN1E.4@79.834,36.36
NetRN1E_5: RN1E.5 RN1E.6 | length 4
  Top w0.203: RN1E.6@78.558,41.857 78.558,40.516 78.794,40.28 79.419,40.28 79.828,40.689 RN1E.5@79.828,41.857
NetRN1F_4: RN1F.4 RN1F.8 | length 8.1
  Top w0.203: RN1F.8@76.024,31.76 76.024,29.965 76.929,29.06 78.297,29.06 78.346,29.109 78.742,29.109 79.834,28.017 RN1F.4@79.834,26.36
NetRN1F_5: RN1F.5 RN1F.6 | length 4
  Top w0.203: RN1F.6@78.558,31.857 78.558,30.516 78.794,30.28 79.419,30.28 79.828,30.689 RN1F.5@79.828,31.857
NetRN1G_4: RN1G.4 RN1G.8 | length 8.1
  Top w0.203: RN1G.8@76.024,21.76 76.024,19.965 76.929,19.06 78.297,19.06 78.346,19.109 78.742,19.109 79.834,18.017 RN1G.4@79.834,16.36
NetRN1G_5: RN1G.5 RN1G.6 | length 4
  Top w0.203: RN1G.6@78.558,21.857 78.558,20.516 78.794,20.28 79.419,20.28 79.828,20.689 RN1G.5@79.828,21.857
NetRN1H_4: RN1H.4 RN1H.8 | length 8.1
  Top w0.203: RN1H.8@76.024,11.76 76.024,9.965 76.929,9.06 78.297,9.06 78.346,9.109 78.742,9.109 79.834,8.017 RN1H.4@79.834,6.36
NetRN1H_5: RN1H.5 RN1H.6 | length 4
  Top w0.203: RN1H.6@78.558,11.857 78.558,10.516 78.794,10.28 79.419,10.28 79.828,10.689 RN1H.5@79.828,11.857
NetRN4_1: RN4.1 RN4.2 | length 4.5
  Top w0.203: RN4.2@104.719,51.62 103.734,51.62 103.344,51.23 103.344,50.53 103.524,50.35 RN4.1@104.719,50.35 104.719,49.53 v1(104.744,49.505)
NetRN4_4: RN4.4 RN4.8 | length 8.3
  Top w0.203: RN4.8@99.319,50.35 101.614,50.35 v1(102.894,51.63) ; v1(102.969,53.955) 103.174,54.16 RN4.4@104.719,54.16
  L3 w0.203: v1(102.894,51.63) 102.969,51.705 v1(102.969,53.955)
O\E\: IC19.13 IC20.13 IC27.7 R65.2 | length 119.1
  Top w0.127: v1(100.944,3.88) 100.944,2.88 102.444,1.38 v1(108.444,1.38) ; v1(101.297,5.787) IC20.13@102.399,5.787 ; v1(102.304,78.595) IC19.13@102.304,79.697 ; IC27.7@124.329,3.43 124.329,2.365 v1(124.194,2.23) 124.574,1.85 R65.2@124.944,1.85
  Bot w0.127: v1(100.944,3.88) 101.025,3.961 101.025,5.062 100.944,5.144 100.944,5.434 v1(101.297,5.787) 101.037,5.787 100.852,5.972 100.852,6.55 100.602,6.799 100.602,7.362 94.186,13.779 94.186,38.635 95.223,39.672 95.223,40.597 95.321,40.696 95.321,42.974 94.186,44.109 94.186,56.879 94.189,56.882 94.189,57.478 94.186,57.481 94.186,75.122 95.648,76.584 102.166,76.584 102.656,77.074 103.511,77.074 103.885,77.448 103.885,77.812 103.626,78.07 102.828,78.07 v1(102.304,78.595) ; v1(108.444,1.38) 109.694,0.13 122.094,0.13 v1(124.194,2.23)
P2V5A: C16.2 C71.2 C75.2 C76.2 C77.1 C92.2 C93.2 C94.2 IC7.1 IC29.5 IC30.5 IC36.31 IC36.37 R70.2 R76.1 R77.1 TP10.1 | length 116.1
  Top w0.127: v2(158.725,28.2) C16.2@159.45,28.2
  Top w0.254: IC36.31@104.039,36.165 104.394,36.165 104.49,36.261 105.133,36.261 105.428,35.966 105.428,35.671 C93.2@106.194,34.905 107.22,34.905 v1(107.225,34.9) 107.225,35.476 107.713,35.964 107.713,38.54 108.329,39.155 C94.2@108.329,39.807 ; IC36.37@104.039,39.165 104.68,39.165 104.76,39.246 105.178,39.246 105.258,39.165 105.609,39.165 C92.2@105.944,38.83 105.969,38.83 106.946,39.807 C94.2@108.329,39.807 ; R77.1@104.394,30.155 104.394,29.53 v1(104.794,29.13) ; IC29.5@110.294,36.532 110.294,37.896 C77.1@110.817,38.419 ; C77.1@110.817,38.694 C77.1@110.817,38.663 ; R70.2@114.724,36.63 IC30.5@114.724,35.83 ; v1(119.032,35.83) 119.032,35.763 118.817,35.548 118.817,35.253 C75.2@118.469,34.905 ; TP10.1@120.136,34.52 119.751,34.905 C75.2@118.469,34.905 ; R76.1@121.159,16.864 121.974,16.864 122.346,17.236 v1(122.412,17.236) ; v2(128.328,21.704) 128.344,21.72 128.344,33.841 v2(128.335,33.85) ; C16.2@159.55,28.2 IC7.1@159.55,29.7 ; C94.2@108.329,39.807 C94.2@108.752,40.23 108.752,38.165 110.319,38.165 C77.1@110.817,38.663 ; C77.1@110.817,38.419 C77.1@110.817,38.663 ; C77.1@110.817,38.419 111.315,37.921 112.617,37.921 112.998,37.541 112.998,36.749 113.273,36.474 113.619,36.474 C76.2@113.771,36.322 114.263,35.83 IC30.5@114.724,35.83 ; IC30.5@114.724,35.83 114.724,35.55 IC30.5@114.895,35.379 114.895,34.429 115.194,34.13 117.694,34.13 C75.2@118.469,34.905
  L3 w0.254: v1(104.794,29.13) 105.594,29.13 107.225,30.761 v1(107.225,34.9)
  Bot w0.127: v1(122.412,17.236) 126.881,21.704 v2(128.328,21.704) 157.598,21.704 158.725,22.832 v2(158.725,28.2)
  Bot w0.254: v1(119.032,35.83) 120.169,35.83 120.594,36.255 127.894,36.255 128.335,35.814 v2(128.335,33.85)
P3V3: C17.2 C18.2 C19.2 C20.2 C21.2 C22.2 C23.2 C24.2 C25.2 C27.2 C28.2 C30.2 C32.2 C33.2 C69.2 C70.2 C123.2 D3.2 D4.2 D9.1 D19.2 D20.2 D21.2 D23.2 D24.2 D25.2 D26.2 IC4.3 IC4.7 IC5.3 IC5.7 IC6.1 IC8.1 IC9.1 IC10.1 IC11.1 IC13.3 IC13.7 IC14.3 IC14.7 IC15.3 IC15.7 IC16.3 IC16.7 IC17.3 IC17.7 IC19.10 IC19.16 IC20.10 IC20.16 IC27.5 IC28.8 IC28.10 IC46.14 L7.2 L8.1 R25.1 R27.1 R29.1 R31.1 R33.1 R36.1 R39.1 R43.1 R65.1 R66.2 | length 447.9
  Top w0.127: v2(-3.5,81.45) -3.49,81.44 D4.2@-3.49,80.7 ; D26.2@-3.49,17.7 v2(-3.49,18.4) ; D23.2@-3.49,38.7 v2(-3.49,39.4) ; D20.2@-3.49,59.7 v2(-3.49,60.4) ; R25.1@8.6,89.67 R27.1@12.1,89.67 R29.1@15.9,89.67 R31.1@19.26,89.67 ; v1(98.957,81.336) C32.2@98.957,80.136 99.396,79.697 IC19.16@100.354,79.697 ; IC20.10@102.399,3.837 v1(103.501,3.837) 104.437,3.837 104.769,3.505 104.769,2.069 v1(104.7,2) ; v1(102.444,8.262) 102.444,7.782 IC20.16@102.399,7.737 104.137,7.737 C33.2@104.444,7.43 ; IC19.10@104.254,79.697 v1(104.254,80.799) ; v1(123.019,2.23) 123.059,2.19 123.059,1.515 123.194,1.38 D9.1@123.834,1.38 124.474,1.38 R65.1@124.944,0.91 ; R66.2@143.077,57.583 142.691,57.97 R66.2@142.641,57.97 142.641,56.909 143.345,56.205 144.344,56.205 145.821,54.729 146.567,54.729 L8.1@146.571,54.729 ; v2(158.825,20.2) C20.2@159.55,20.2 IC9.1@159.55,21.7 ; v2(158.9,12.2) C18.2@159.55,12.2 IC11.1@159.55,13.7 ; IC17.7@160.25,39.55 160.25,38.25 160.75,37.75 IC17.3@160.75,36.45 160.867,36.333 C27.2@160.867,35.222 160.867,34.558 v1(160.9,34.525) ; IC15.7@160.25,47.55 160.246,47.546 160.246,46.305 160.75,45.801 IC15.3@160.75,44.45 160.75,43.415 160.917,43.247 160.976,43.305 v1(161.675,43.305) ; IC14.7@160.25,56.05 160.25,54.287 160.75,53.787 IC14.3@160.75,52.95 160.75,51.859 C30.2@160.988,51.62 161.002,51.606 v1(161.002,50.736) ; v2(164.4,31.2) C17.2@165.05,31.2 IC6.1@165.05,32.7 ; v2(164.45,23.2) C21.2@165.05,23.2 IC8.1@165.05,24.7 ; v1(165.5,44.65) 165.75,44.4 IC16.7@165.75,43.55 165.746,43.546 165.746,42.382 166.25,41.878 IC16.3@166.25,40.45 ; IC5.7@165.75,53.55 165.75,52.25 166.25,51.75 IC5.3@166.25,50.45 166.318,50.383 C22.2@166.318,49.188 v2(166.318,48.518) ; IC13.7@165.75,61.55 165.75,59.9 166.25,59.4 IC13.3@166.25,58.45 166.25,57.399 C28.2@166.464,57.185 v2(167.094,57.185) ; C23.2@166,70.9 166,70.5 165.75,70.25 IC4.3@165.75,69.55 165.75,67.8 166.25,67.3 IC4.7@166.25,66.45
  Top w0.152: IC27.5@121.789,3.43 121.794,3.435 v1(121.794,4.58)
  Top w0.203: C25.2@160.821,40.818 C25.2@160.823,40.818 v2(161.499,40.818) ; v2(164.325,15.2) C19.2@165.05,15.2 IC10.1@165.05,16.7 ; C23.2@166,70.9 v2(166.6,70.9)
  Top w0.254: R39.1@8.07,1.7 8.738,1.7 v2(9.408,1.03) 11.945,1.03 ; R43.1@11.97,1.7 11.97,1.055 11.945,1.03 ; R33.1@15.77,1.7 15.77,1.032 15.768,1.03 ; R31.1@19.3,89.67 v1(19.3,90.8) ; R36.1@19.37,1.7 19.37,1.24 19.16,1.03 15.768,1.03 ; C123.2@173.05,-1 173.508,-1 173.958,-0.55 IC46.14@174.8,-0.55 ; 11.945,1.03 15.768,1.03
  Top w0.381: IC28.8@143.242,63.415 143.885,63.415 ; IC28.10@143.242,64.415 143.378,64.55 v1(143.378,65.215) ; v1@144.085,63.215 145.665,61.635 L7.2@146.165,61.635 ; v2(173.05,-1.575) C123.2@173.05,-1
  Top w0.762: v3(139.726,51.872) 139.726,51.95 140.28,52.505 141.149,52.505 v3(141.149,51.872) ; L7.2@146.165,61.635 145.948,61.417 C70.2@145.948,59.018 ; L8.1@146.567,54.729 145.948,55.348 C70.2@145.948,59.018 ; L8.1@146.571,54.729 153.571,54.729 156.35,51.95 v3(157.2,51.95) ; C69.2@147.512,59.494 146.423,59.494 C70.2@145.948,59.018
  L3 w0.127: v1(104.7,2) v1@104.726,1.974
  L3 w0.203: v1(102.444,8.262) 102.444,4.893 v1(103.501,3.837) ; v1@104.726,1.974 108.523,1.974 111.948,5.4 118.5,5.4 121.67,2.23 v1(123.019,2.23)
  L3 w0.254: v1(19.3,90.8) 19.773,91.273 95.151,91.273 98.957,87.467 v1(98.957,81.336)
  L3 w0.508: v1@98.972,81.352 99.525,80.799 v1(104.254,80.799) 108.513,76.54 108.513,64.569 119.127,53.955 129.644,53.955 131.91,56.221 131.91,62.731 132.579,63.401 132.809,63.401 137.343,67.935 141.631,67.935 143.378,66.187 v1(143.378,65.215) ; v1@143.181,65.178 143.181,63.753 143.657,63.277 144.133,63.277 v1(144.141,63.27)
  Bot w0.254: D24.2@-3.52,82.4 -4,82.4 -4.3,82.1 -4.3,81.444 ; v2(-3.5,81.45) -3.506,81.444 -4.3,81.444 ; D25.2@-3.49,16.3 v2(-3.49,15.6) -4.3,15.6 ; v2(-3.49,18.4) -4.3,18.4 ; D21.2@-3.49,37.3 v2(-3.49,36.6) -4.3,36.6 ; v2(-3.49,39.4) -4.3,39.4 ; D19.2@-3.49,58.3 v2(-3.49,57.6) -4.3,57.6 ; v2(-3.49,60.4) -4.3,60.4 ; D3.2@-3.49,79.3 -4.291,79.3 -4.3,79.309 ; D24.2@-3.49,82.4 6,82.4 8.6,85 8.6,90 9.4,90.8 v1(19.3,90.8) ; v2(9.408,1.03) 7.97,1.03 5.35,3.65 -1.65,3.65 -4.3,6.3 -4.3,15.6 ; -4.3,15.6 -4.3,18.4 ; -4.3,18.4 -4.3,36.6 ; -4.3,36.6 -4.3,39.4 ; -4.3,39.4 -4.3,57.6 ; -4.3,57.6 -4.3,60.4 ; -4.3,60.4 -4.3,79.309 ; -4.3,79.309 -4.3,80.664 -4.3,81.444
  other v3: 137.299,52.505 138.328,52.505
P3V3_DIOT: C108.2 C110.2 C118.1 D17.2 IC37.2 IC37.14 IC39.8 IC41.5 R102.2 R103.2 R104.1 R107.1 R109.1 R110.1 R113.1 | length 85.3
  Top w0.254: IC37.2@180.801,6.475 183.27,6.475 ; R103.2@183.27,5.8 183.27,6.475 ; IC41.5@184.4,11.55 184.4,10.23 R109.1@183.27,9.1 183.27,6.475
  Top w0.381: v2(158.316,10.57) R110.1@158.9,10.57 R113.1@160,10.57 ; R113.1@159.975,10.595 R113.1@160.01,10.63 ; v2(164.4,0.4) R102.2@165.03,0.4 ; v2(168.8,8) C110.2@169.45,8 169.43,7.98 IC39.8@169.43,6.405 ; IC39.8@169.4,6.405 IC39.8@169.43,6.405 ; IC39.8@169.435,6.35 169.43,6.355 IC39.8@169.43,6.405 ; IC37.14@174.8,5.85 173.1,5.85 C108.2@173.05,5.8 v2(173.05,6.45) 172.6,6.9 171.1,6.9 170.605,6.405 IC39.8@169.43,6.405 ; v2(176.4,11.275) 177.4,11.275 177.925,11.8 C118.1@181.8,11.8 182.05,11.55 184.27,11.55 IC41.5@184.4,11.55 185.347,11.55 185.807,12.01 185.807,15.253 185.306,15.754 D17.2@184.43,15.754 ; R107.1@183.27,4.8 R103.2@183.27,5.8 ; R104.1@186.37,3 186.37,2.355 v2(186.375,2.35)
  L3 w0.381: v2(173.05,6.45) 173.8,5.7 181.139,5.7 184.488,2.35 v2(186.375,2.35)
  Bot w0.381: v2(158.316,10.57) 161.03,10.57 162.4,9.2 167.6,9.2 v2(168.8,8) 169.45,7.35 169.45,7.075 ; v2(164.4,0.4) 166.8,0.4 169.45,3.05 169.45,7.075 ; v2(173.05,6.45) 173.05,7.075 ; v2(176.4,11.275) 176.375,11.3 174.155,11.3 173.05,10.195 173.05,7.075 ; 169.45,7.075 173.05,7.075
P3V3_MP: C15.2 C113.2 C120.2 D17.1 IC3.2 IC3.3 IC3.16 IC40.8 IC43.8 J1.30 R114.2 R115.2 R119.2 TP15.1 | length 176.2
  Top w0.254: C113.2@137.21,47.62 R114.2@136.13,47.62 135.251,47.62 134.95,47.319 134.95,19.722 143.58,11.092 C120.2@143.58,6.25 ; C113.2@137.23,47.6 138.605,47.6 IC40.8@138.655,47.65 138.655,46.325 139.192,45.789 140.677,45.789 141.722,44.744 141.722,44.271 ; R115.2@141.03,41.42 141.564,41.42 141.722,41.578 141.722,44.271 ; C120.2@143.55,6.2 143.58,6.2 IC43.8@144.795,6.2 ; R119.2@144.03,42.72 TP15.1@144.03,44.25 141.744,44.25 141.722,44.271
  Top w0.508: C15.2@110.919,10.63 110.701,10.63 110.249,10.178 IC3.16@110.249,8.78 110.249,5.825 111.619,4.455 ; IC3.2@111.519,-0.52 111.519,2.955 112.319,3.755 ; IC3.3@112.789,-0.52 112.789,3.285 112.319,3.755 ; v1(114.619,4.905) 114.319,5.205 112.369,5.205 111.619,4.455 ; v2(143.55,4.6) C120.2@143.55,6.2 ; v2(164.746,11.6) 165.446,12.3 168.502,12.3 171.891,12.3 176.95,12.3 182.05,17.4 187.03,17.4 ; D17.1@187.03,15.754 187.03,17.4 ; J1.30@194.312,20.95 194.15,20.95 190.6,17.4 187.03,17.4 ; 111.619,4.455 112.319,3.755
  L3 w0.508: v1(114.619,4.905) 117.519,4.905 121.602,0.822 129.689,0.822 133.467,4.6 v2(143.55,4.6) 143.552,4.598 153.988,4.598 158,8.61 160.36,8.61 163.35,11.6 v2(164.746,11.6)
P3V3_MP2: C121.2 C122.2 D22.2 IC18.4 IC44.8 J2.30 | length 312.9
  Top w0.203: C121.2@137.95,-1.5 137.95,-0.55 138.55,0.05 IC18.4@138.8,0.05
  Top w0.254: C122.2@133.455,6.195 IC44.8@134.8,6.195
  Top w0.5: C122.2@133.48,6.25 v2(133.48,3.07) 133.48,-1.555 134.175,-2.25 137.851,-2.25 137.95,-2.151 C121.2@137.95,-1.5
  Top w0.508: D22.2@-3.52,83.8 -2.291,83.8 v2(-1.825,84.266)
  Top w1.27: v2(152.4,53.3) 153.63,52.07 v2@153.63,17.157
  L3 w0.127: v2(-1.825,84.266) -1.191,84.9 2.472,84.9 3.899,86.327 3.899,87.836 7.654,91.59 20.611,91.59 115.507,91.591 v1(115.707,91.391)
  Bot w0.127: v1(115.707,91.391) 115.707,79.93 115.944,79.693 115.944,63.08 125.294,53.73 130.381,53.73 132.156,55.505 145.783,55.505
  Bot w0.508: 145.783,55.505 148.847,55.505 149.62,56.278 149.62,59.088 150.552,60.02 152.578,60.02 153.65,58.948 153.65,57.25 152.4,56 v2(152.4,53.3)
  Bot w1: v2(133.48,3.07) 133.48,11.68 138.957,17.157 v2(153.603,17.157) 173.182,17.157 175.542,19.517 J2.30@175.542,20.976
P3V3A: C67.1 C68.2 D7.1 IC29.1 IC29.3 IC30.1 L8.2 R60.2 TP11.1 | length 98.2
  Top w0.152: IC30.1@114.895,32.679 114.869,32.654 114.869,31.194 115.083,30.98 116.695,30.98 117.795,32.08 119.569,32.08 119.869,31.78 119.869,30.42 119.077,29.628 119.077,24.335 118.941,24.198 118.941,20.803 119.323,20.42 120.087,20.42 122.549,17.959 122.99,17.959 123.94,17.009 123.94,14.484 124.444,13.98 D7.1@124.444,13.02 124.444,12.38 124.474,12.35 R60.2@125.944,12.35
  Top w0.254: IC29.1@110.294,33.832 110.294,34.994 110.681,35.381 112.037,35.381 112.538,34.88 113.425,34.88 114.059,34.246 v7(114.059,34.035) 112.342,34.035 112.194,33.887 IC29.3@112.194,33.832
  Top w0.762: C68.2@112.844,32.13 113.393,32.679 114.369,32.679 ; v7(114.059,34.035) 114.156,33.937 114.156,33.198 114.369,32.985 114.369,32.679 ; IC30.1@114.895,32.679 114.369,32.679 ; v7(127.345,34.932) 133.196,40.782 133.196,51.726 135.75,54.28 142.33,54.28 143.611,52.999 144.35,52.999 145.821,51.529 L8.2@146.571,51.529 147.321,51.529 147.94,50.91 147.94,49.948 148.558,49.33 ; C67.1@147.169,48.164 147.444,48.164 148.558,49.277 148.558,49.33 ; TP11.1@149.558,48.33 148.558,49.33
  Bot w0.762: v7(114.059,34.035) 114.114,33.98 122.641,33.98 123.593,34.932 v7(127.345,34.932)
P5V0A: C82.2 C83.2 C84.1 C87.2 C88.2 C89.2 C90.2 C91.2 IC32.1 IC36.15 IC36.21 IC36.44 IC36.52 R73.2 R78.2 TP13.1 | length 90.4
  Top w0.254: v1(96.294,32.68) 96.294,32.365 97.102,31.557 C91.2@97.155,31.557 ; C90.2@97.465,43.33 97.465,41.409 97.534,41.34 IC36.52@97.864,41.34 ; C90.2@97.619,43.33 98.244,43.955 98.244,44.68 98.344,44.78 98.344,45.78 100.444,47.88 101.944,47.88 103.414,46.41 R78.2@103.414,46.38 104.198,45.596 104.198,44.384 v1(103.796,43.982) 103.394,43.58 C88.2@102.694,43.58 101.894,42.78 101.894,41.37 IC36.44@101.864,41.34 ; IC36.15@97.864,33.49 97.754,33.38 97.444,33.38 97.155,33.091 C91.2@97.155,31.557 ; IC36.21@100.864,33.49 100.864,32.948 100.944,32.867 100.944,32.147 100.498,31.701 C87.2@100.432,31.635 ; 101.269,29.358 101.269,29.93 101.444,30.105 101.444,30.755 100.564,31.635 C87.2@100.432,31.635 ; C82.2@113.494,27.63 114.214,26.91 R73.2@114.694,26.91 ; C83.2@118.244,31.13 117.444,31.13 117.194,30.88 117.194,29.835 IC32.1@117.244,29.785 118.4,29.785 118.747,29.438 118.747,24.472 118.611,24.335 118.611,20.666 119.238,20.039 119.482,20.039 119.533,20.09 119.95,20.09 120.246,19.795 120.246,18.002 119.238,16.994 119.238,15.823 TP13.1@119.206,15.792 ; C91.2@97.155,31.557 97.233,31.635 C89.2@98.933,31.635 C87.2@100.432,31.635
  Top w0.508: 101.269,29.358 101.269,28.35 101.964,27.655 104.211,27.655 105.597,29.041 105.597,30.179 v1(105.597,30.787) 105.597,31.533 106.025,31.961 108.752,31.961 108.975,31.738 108.975,31.674 109.194,31.455 109.194,30.13 110.7,28.624 113.202,28.624 113.425,28.847 ; C82.2@113.494,27.63 113.425,27.699 113.425,28.624 113.425,28.847 ; IC32.1@117.244,29.785 114.899,29.785 114.373,29.259 113.837,29.259 113.425,28.847
  L3 w0.508: v1(103.796,43.982) 103.744,43.93 103.744,32.14 105.597,30.287 v1@105.597,30.13
  other v1: 105.607,30.179
P6V0: C78.2 C79.2 IC31.8 IC31.10 L9.2 L10.1 R69.2 R72.2 | length 28.2
  Top w0.127: L9.2@132.547,57.113 132.547,57.79 134.523,57.79 134.95,58.217 v1@134.95,58.979 ; v1(134.523,60.17) 134.594,60.098 135.229,60.098 135.241,60.087 135.241,60.055 135.556,60.055 IC31.8@135.591,60.02 ; v1@135.209,59.02 IC31.10@135.591,59.02 135.591,57.72 C78.2@135.641,57.72 ; R72.2@139.861,60.52 139.861,59.8 v1(139.891,59.77) ; v1(142.641,61.615) 142.671,61.585 R69.2@142.671,61.02
  Top w0.762: C79.2@129.161,56.47 129.305,56.614 131.695,56.614 L9.2@132.176,57.095 ; L10.1@131.226,51.53 131.226,53.779 132.694,55.247 132.694,56.929 L9.2@132.529,57.095
  L3 w0.127: v1@134.991,59.02 135.406,58.604 138.725,58.604 v1(139.891,59.77) 140.796,59.77 v1(142.641,61.615)
  Bot w0.127: v1(134.523,60.17) 134.976,59.717 v1(134.976,59.058)
P6V0A: C80.1 C81.2 D8.1 IC32.5 IC32.8 L10.2 R53.2 R64.2 TP12.1 | length 60
  Top w0.203: IC32.8@122.644,29.785 125.51,29.785 ; R53.2@125.819,19.08 125.819,20.18 126.019,20.38 126.019,24.605 126.694,25.28 TP12.1@126.694,26.13
  Top w0.254: v1(132.841,62.77) R64.2@133.648,62.77 ; D8.1@133.501,64.77 133.545,64.77 133.648,64.667 133.648,62.838 R64.2@133.691,62.795
  Top w0.762: IC32.5@122.644,25.975 C81.2@124.694,25.975 ; C81.2@124.694,25.98 C81.2@124.694,25.975 ; L10.2@128.026,51.53 128.026,50.774 129.394,49.406 v1(129.394,49.13) 129.394,48.03 C80.1@129.244,47.88 ; C80.1@129.244,47.636 129.244,38.794 126.025,35.575 126.025,30.083 125.727,29.785 126.694,28.818 TP12.1@126.694,26.13 126.539,25.975 C81.2@124.694,25.975
  L3 w0.254: v1(129.394,49.13) 132.841,52.577 v1(132.841,62.77)
P12V0: C57.2 C114.2 C115.2 D16.1 FL1.2 IC27.8 J1.28 J1.29 J2.28 J2.29 L4.1 R86.2 R100.2 R118.2 R154.2 R155.2 R156.2 TP14.1 | length 187.3
  Top w0.203: R118.2@146.33,42.72 TP14.1@146.33,44.25
  Top w0.508: IC27.8@125.599,3.43 v2(126.439,3.43) 128.01,3.43 129.53,4.95 129.53,32.656 134.23,37.356 v2(134.23,50.55) ; TP14.1@146.33,44.25 146.33,45.143 147.169,45.983 150.091,45.983 151.244,47.136 v2(151.244,52.505) ; R156.2@191.9,15.32 v2(191.9,16.275) ; R155.2@192.925,15.32 v2(192.925,16.275) ; R154.2@193.95,15.32 v2(193.95,16.275) ; R100.2@194.95,15.32 v2(194.95,16.275)
  Top w0.762: v4(111.619,78.555) 111.619,81.63 112.044,82.055 R86.2@112.044,83.98
  Top w1: C57.2@150.704,57.872 151.782,58.95 153.493,58.95 L4.1@154.048,58.395 ; D16.1@165.3,81.65 165.3,78.78 C114.2@165.33,78.75 C115.2@167.73,78.75 167.73,80.15 168.63,81.05 FL1.2@171.175,81.05 ; L4.1@154.048,58.395 154.493,57.95 v3(156.23,57.95) v3(156.23,58.95) 154.603,58.95 L4.1@154.048,58.395 ; FL1.2@171.175,81.05 170.2,80.075 v3(170.2,78.075) v3(170.2,77.125) v3(170.2,76.275) v3(171.175,76.275) v3(171.175,77.125) v3(171.175,78.065) FL1.2@171.175,81.05
  Bot w0.508: 133.394,52.43 134.23,51.594 v2(134.23,50.55)
  Bot w0.762: v4(111.619,78.555) 111.619,77.244 110.325,75.95 110.325,59.275 117.97,51.63 132.594,51.63 133.394,52.43 135.693,54.729 150.461,54.729 151.244,53.946 v2(151.244,52.505) ; 150.394,54.729 v3(150.394,56.205) ; v3@150.594,56.005 150.894,56.305 ; v3(151.119,56.53) 151.769,57.18 v3(151.769,58.95)
  Bot w1: J2.29@173.002,20.976 J2.28@175.542,23.516 ; J1.29@191.772,20.95 J1.28@194.312,23.49
  other v3: 151.244,55.805
P12V0_DIOT: C117.2 IC41.1 IC41.3 J8.A1 J8.D1 J8.E1 J8.G1 J8.H1 J8.J1 J8.K1 R100.1 R154.1 R155.1 R156.1 | length 15.9
  Top w0.254: IC41.1@187,11.55 190.234,11.55 190.914,12.229 190.914,14.371 ; IC41.3@187,13.45 187,14.152 187.248,14.4 v2(189.9,14.4) 189.929,14.371 190.914,14.371 ; R156.1@191.899,14.371 190.914,14.371
  Top w0.508: v2(191.9,13.425) R156.1@191.9,14.38 ; v2(192.9,13.425) R155.1@192.9,14.38 ; v2(193.925,13.425) R154.1@193.925,14.38 ; v2(194.95,13.425) R100.1@194.95,14.38